# EAGLE board RS232-TTL (EAGLE 9.6.2)
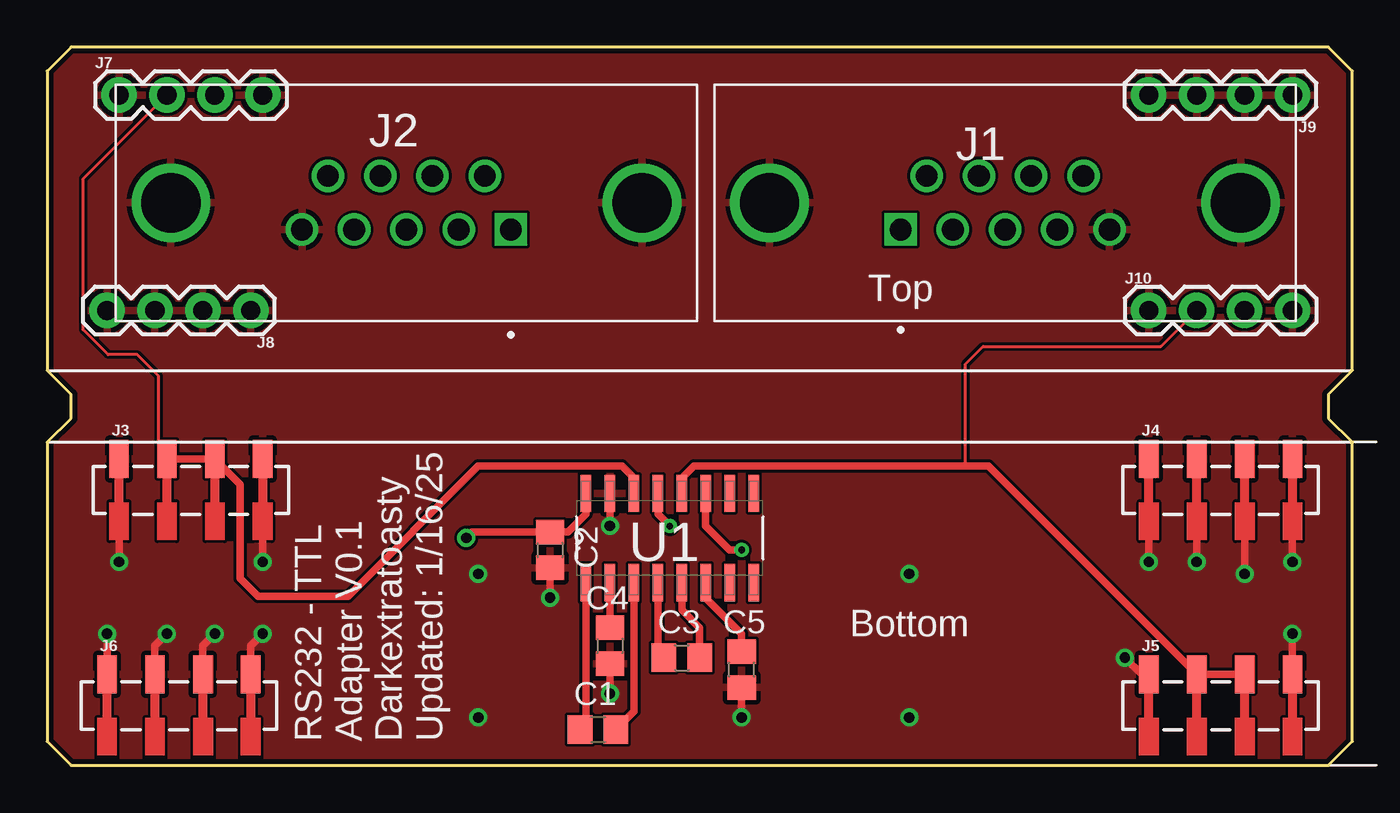
[diagram p0: board, top side]
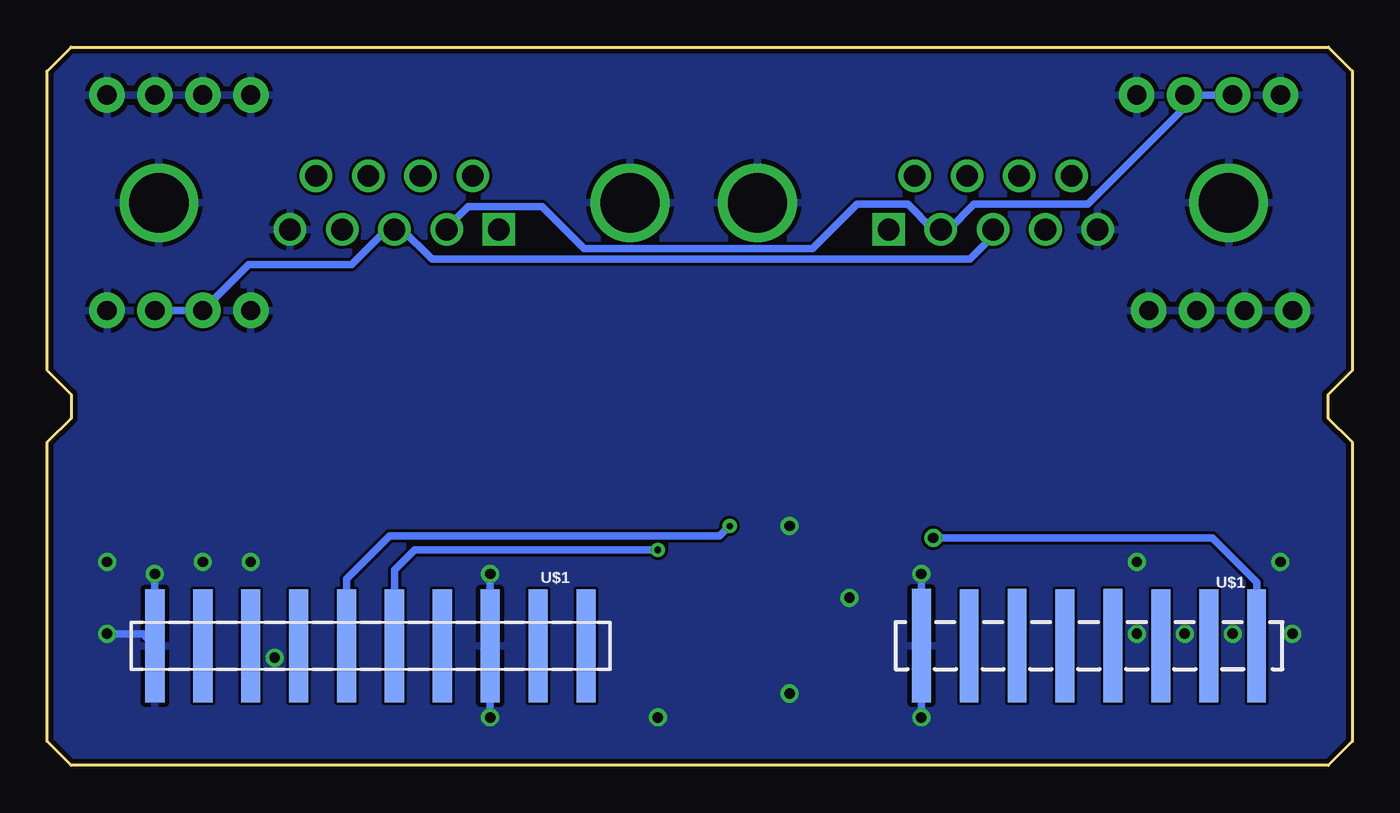
[diagram p1: board, bottom side, seen from below]

Size 69.21 x 38.1 mm. Coordinates in mm from the lower left corner, seen from the top.
Outline: 0,17.15 0,1.27 1.27,0 67.94,0 69.21,1.27 69.21,17.15 67.94,18.41 67.94,19.69 69.21,20.95 69.21,36.83 67.94,38.1 1.27,38.1 0,36.83 0,20.95 1.27,19.69 1.27,18.41 0,17.15
Copper layers (1*16): Top 0.035mm / dielectric 1.5mm / Bottom 0.035mm
Design rules "default *": minimum track width 6mil, minimum drill 0.35mm, track to track 6mil, track to pad 6mil, pad to pad 6mil, via to via 6mil, smd to smd 6mil, copper to edge 10mil, drill to drill 6mil, minimum pad ring 10mil, minimum via ring 8mil, stop-mask expansion 4mil, vias tented up to drill 0mil, thermal gap 10mil

## Footprints (pad centres in the part's own frame; a part is rotated, then mirrored left to right if it is on the bottom)
C0805 = smd 1.3 x 1.5: 1 -0.95,0; 2 0.95,0
AMPHENOL_L77SDEH09SOL2RM5 = drill 1.15 square: 1 5.54,1.42 | drill 1.15: 2 2.77,1.42; 3 0,1.42; 4 -2.77,1.42; 5 -5.54,1.42; 6 4.155,-1.42; 7 1.385,-1.42; 8 -1.385,-1.42; 9 -4.155,-1.42 | drill 3.15: SH1 -12.495,0; SH2 12.495,0
AMPHENOL_L717SDEH09POL2RM8 = drill 1.15 square: 1 -5.54,1.42 | drill 1.15: 2 -2.77,1.42; 3 0,1.42; 4 2.77,1.42; 5 5.54,1.42; 6 -4.155,-1.42; 7 -1.385,-1.42; 8 1.385,-1.42; 9 4.155,-1.42 | drill 3.15: SH1 -12.495,0; SH2 12.495,0
1X04_SMD_VERTICAL_COMBO_CENTERED = smd 1 x 2: 1 -3.81,1.65; 2 -1.27,1.65; 3 1.27,1.65; 4 3.81,1.652
1X04 = drill 1.016 pad 1.88: 1 0,0; 2 2.54,0; 3 5.08,0; 4 7.62,0
SOIC127P600X175-16N = smd 1.981 x 0.559: 1 -2.362,4.445; 2 -2.362,3.175; 3 -2.362,1.905; 4 -2.362,0.635; 5 -2.362,-0.635; 6 -2.362,-1.905; 7 -2.362,-3.175; 8 -2.362,-4.445; 9 2.362,-4.445; 10 2.362,-3.175; 11 2.362,-1.905; 12 2.362,-0.635; 13 2.362,0.635; 14 2.362,1.905; 15 2.362,3.175; 16 2.362,4.445
BOTH-SMD = smd 1.02 x 6 bottom: 1 7.62,0; 2 10.16,0; 3 12.7,0; 4 15.24,0; 5 17.78,0; 6 20.32,0; 7 22.86,0; 8 25.4,0; 9 27.94,0; 10 30.48,0 | smd 1 x 6 bottom: 19 -27.94,-0.001; 20 -22.86,-0.001; 21 -20.32,0.001; 22 -17.78,-0.001; 23 -15.24,0.001; 24 -12.7,-0.001; 25 -10.16,0.001; 26 -25.4,-0.001

## Placement (x,y rotation side)
C1  47nf  [C0805]  29.21,1.91 0 top
C2  47nf  [C0805]  26.67,11.43 270 top
C3  330nf  [C0805]  33.66,5.71 0 top
C4  330nf  [C0805]  29.85,6.35 270 top
C5  330nf  [C0805]  36.83,5.08 90 top
J1  L77SDEH09SOL2RM5  [AMPHENOL_L77SDEH09SOL2RM5]  50.8,29.84 180 top
J2  L717SDEH09POL2RM8  [AMPHENOL_L717SDEH09POL2RM8]  19.05,29.84 180 top
J3  [1X04_SMD_VERTICAL_COMBO_CENTERED]  7.62,14.6 0 top
J4  [1X04_SMD_VERTICAL_COMBO_CENTERED]  62.23,14.6 0 top
J5  [1X04_SMD_VERTICAL_COMBO_CENTERED]  62.23,3.18 0 top
J6  [1X04_SMD_VERTICAL_COMBO_CENTERED]  6.99,3.18 0 top
J7  [1X04]  3.81,35.56 0 top
J8  [1X04]  10.79,24.13 180 top
J9  [1X04]  66.04,35.56 180 top
J10  [1X04]  58.42,24.13 0 top
U1  SP3232EEN-L  [SOIC127P600X175-16N]  33.02,12.06 90 top
U$1  BOTH-SMD  [BOTH-SMD]  33.02,6.35 0 top

## Library data of the parts
C1-C5 = rcl; SPICEPREFIX: C
J1 = L77SDEH09SOL2RM5; CHECK_PRICES: https://www.snapeda.com/parts/L77SDEH09SOL2RM5/Amphenol/view-part/?ref=eda; DESCRIPTION: Dsub, Stamped Signal 3A, Straight PCB Thru Hole, 09 Socket, Flash Gold, Bright Tin Shell, 4-40 Threaded Standoff 6.0mm (0.236in), With Boardlock 4.2mm (0.165in); DIGIKEY_PART_NUMBER: L77SDEH09SOL2RM5-ND; MF: Amphenol ICC; MP: L77SDEH09SOL2RM5; PACKAGE: None; SNAPEDA_LINK: https://www.snapeda.com/parts/L77SDEH09SOL2RM5/Amphenol/view-part/?ref=snap
J2 = L717SDEH09POL2RM8; CHECK_PRICES: https://www.snapeda.com/parts/L717SDEH09POL2RM8/Amphenol/view-part/?ref=eda; DESCRIPTION: Dsub, Stamped Signal 3A, Straight PCB Thru Hole, 09 Pin, Flash Gold, Bright Tin Shell+Grounding Dimples, 4-40 Removable Front Screwlock, Standoff 6.0mm (0.236in), With Boardlock 4.2mm (0.165in); DIGIKEY_PART_NUMBER: L717SDEH09POL2RM8-ND; MF: Amphenol ICC; MP: L717SDEH09POL2RM8; PACKAGE: None; SNAPEDA_LINK: https://www.snapeda.com/parts/L717SDEH09POL2RM8/Amphenol/view-part/?ref=snap
J3-J6 = SparkFun-Connectors; PROD_ID: CONN-17242
J7-J10 = SparkFun-Connectors; PROD_ID: CONN-09696
U1 = SP3232EEN-L; AVAILABILITY: In Stock; CHECK_PRICES: https://www.snapeda.com/parts/SP3232EEN-L/MaxLinear/view-part/?ref=eda; DESCRIPTION: 2/2 Transceiver Full RS232 16-SOIC; MF: MaxLinear, Inc.; MP: SP3232EEN-L; PACKAGE: SOIC-16 Exar; PRICE: None; SNAPEDA_LINK: https://www.snapeda.com/parts/SP3232EEN-L/MaxLinear/view-part/?ref=snap
U$1 = Flipper-Zero-GPIO-Headers

## Nets
+5V: C2.1 U1.16 U$1.19
AO_RX: U1.9
AO_TX: U1.7
AUX_RX: U1.8
AUX_TX: U1.10
FLIP_RX: U1.13 U$1.6
FLIP_TX: U1.11 U$1.5
FO_RX: J1.3 J2.3 J5.2 J5.3 J10.2 J10.3 U1.12
FO_TX: J1.2 J2.2 J3.2 J3.3 J7.2 J7.3 U1.14
GND: C2.2 C4.2 C5.1 J1.5 J1.SH1 J1.SH2 J2.5 J2.SH1 J2.SH2 J3.1 J3.4 J4.1 J4.2 J4.3 J4.4 J5.1 J5.4 J6.1 J6.2 J6.3 J6.4 J7.1 J7.4 J8.1 J8.2 J8.3 J8.4 J9.1 J9.2 J9.3 J9.4 J10.1 J10.4 U1.15 U$1.3 U$1.10 U$1.25
N$1: C4.1 U1.2
N$2: C1.1 U1.1
N$3: C3.2 U1.5
N$4: C3.1 U1.4
N$5: C1.2 U1.3
N$8: C5.2 U1.6

## Tracks (layer width: path | path; a pad name or v marks a point on that pad's centre or on a via)
+5V  (via drill 0.55)
  Top 0.406: U1.16 28.57,13.33 27.62,12.38 C2.1 22.54,12.38 v22.22,12.06
  Bottom 0.406: U$1.19 5.08,9.72 7.43,12.06 v22.22,12.06
FLIP_RX  (via drill 0.35)
  Top 0.406: v33.02,12.7 32.39,13.33 U1.13
  Bottom 0.406: U$1.6 53.34,9.88 51.06,12.16 33.56,12.16 v33.02,12.7
FLIP_TX  (via drill 0.35)
  Top 0.406: v36.83,11.43 36.2,11.43 34.93,12.7 U1.11
  Bottom 0.406: U$1.5 50.8,10.36 49.73,11.43 v36.83,11.43
FO_RX
  Top 0.152: 48.7,15.87 48.7,21.3 49.63,22.23 59.05,22.23 J10.2
  Top 0.406: J5.3 J5.2 49.91,15.87 48.7,15.87 34.29,15.87 33.66,15.24 U1.12
  Bottom 0.406: J10.3 J10.2 58.52,26.57 53.07,26.57 51.21,28.43 J1.3 50.39,28.43 48.81,26.85 20.29,26.85 19.05,28.09 J2.3
FO_TX
  Top 0.152: J3.2 5.91,16.7 5.91,20.66 4.79,21.78 3.23,21.78 1.91,23.11 1.91,31.12 J7.2
  Top 0.406: J3.2 J3.3 10.24,14.91 10.24,9.93 11.2,8.97 15.95,8.97 22.86,15.87 30.48,15.87 31.11,15.24 U1.14
  Bottom 0.406: J1.2 48.03,28.52 46.91,29.64 42.98,29.64 40.74,27.41 28.63,27.41 26.27,29.77 23.58,29.77 22.23,28.43 J2.2 21.41,28.43 20.06,29.77 14.03,29.77 8.89,34.91 J7.3 J7.2
GND  (via drill 0.55)
  Top 0.406: C4.2 v29.85,3.81 | C5.1 v36.83,2.54 | C2.2 v26.67,8.89 | U1.15 v29.85,12.7 | J5.1 58.04,4.82 v57.15,5.71 | J5.4 v66.04,6.98 | J4.3 v63.5,10.16 | J4.2 v60.96,10.79 | J4.1 v58.42,10.79 | J4.4 v66.04,10.79 | J6.1 v3.17,6.98 | J6.2 5.72,6.35 v6.35,6.98 | J6.3 8.25,6.35 v8.89,6.98 | J6.4 10.79,6.35 v11.43,6.98 | J3.4 v11.43,10.79 | J3.1 v3.81,10.79
  Bottom 0.406: v45.72,10.16 U$1.3 v45.72,2.54 | v63.5,10.16 U$1.10 64.13,6.98 v66.04,6.98 | v22.86,10.16 U$1.25 v22.86,2.54
  pour Top: -3.81,45.09 73.66,45.09 73.66,-1.91 -3.81,-1.91
  pour Bottom: -5.71,46.36 75.56,46.36 75.56,-3.17 -5.71,-3.17
N$1
  Top 0.406: U1.2 C4.1
N$2
  Top 0.406: U1.1 28.57,2.22 C1.1
N$3
  Top 0.406: U1.5 33.66,8.26 34.61,7.3 C3.2
N$4
  Top 0.406: U1.4 32.39,6.04 C3.1
N$5
  Top 0.406: U1.3 31.11,2.86 C1.2
N$8
  Top 0.406: U1.6 34.93,8.89 36.83,6.98 C5.2

## Text on the board
tPlace: Top | Bottom | RS232 - TTL / Adapter V0.1 / Darkextratoasty / Updated: 1/16/25